# Altium PCB L298N.PcbDoc
Units mm, origin at the board's own origin, x right, y up, seen from the top; angles counter-clockwise.
Board outline 50.1 x 43.1 mm, 2 copper layers (Top Layer, Bottom Layer); 20 components, 15 nets, 63 pads, 2 vias.
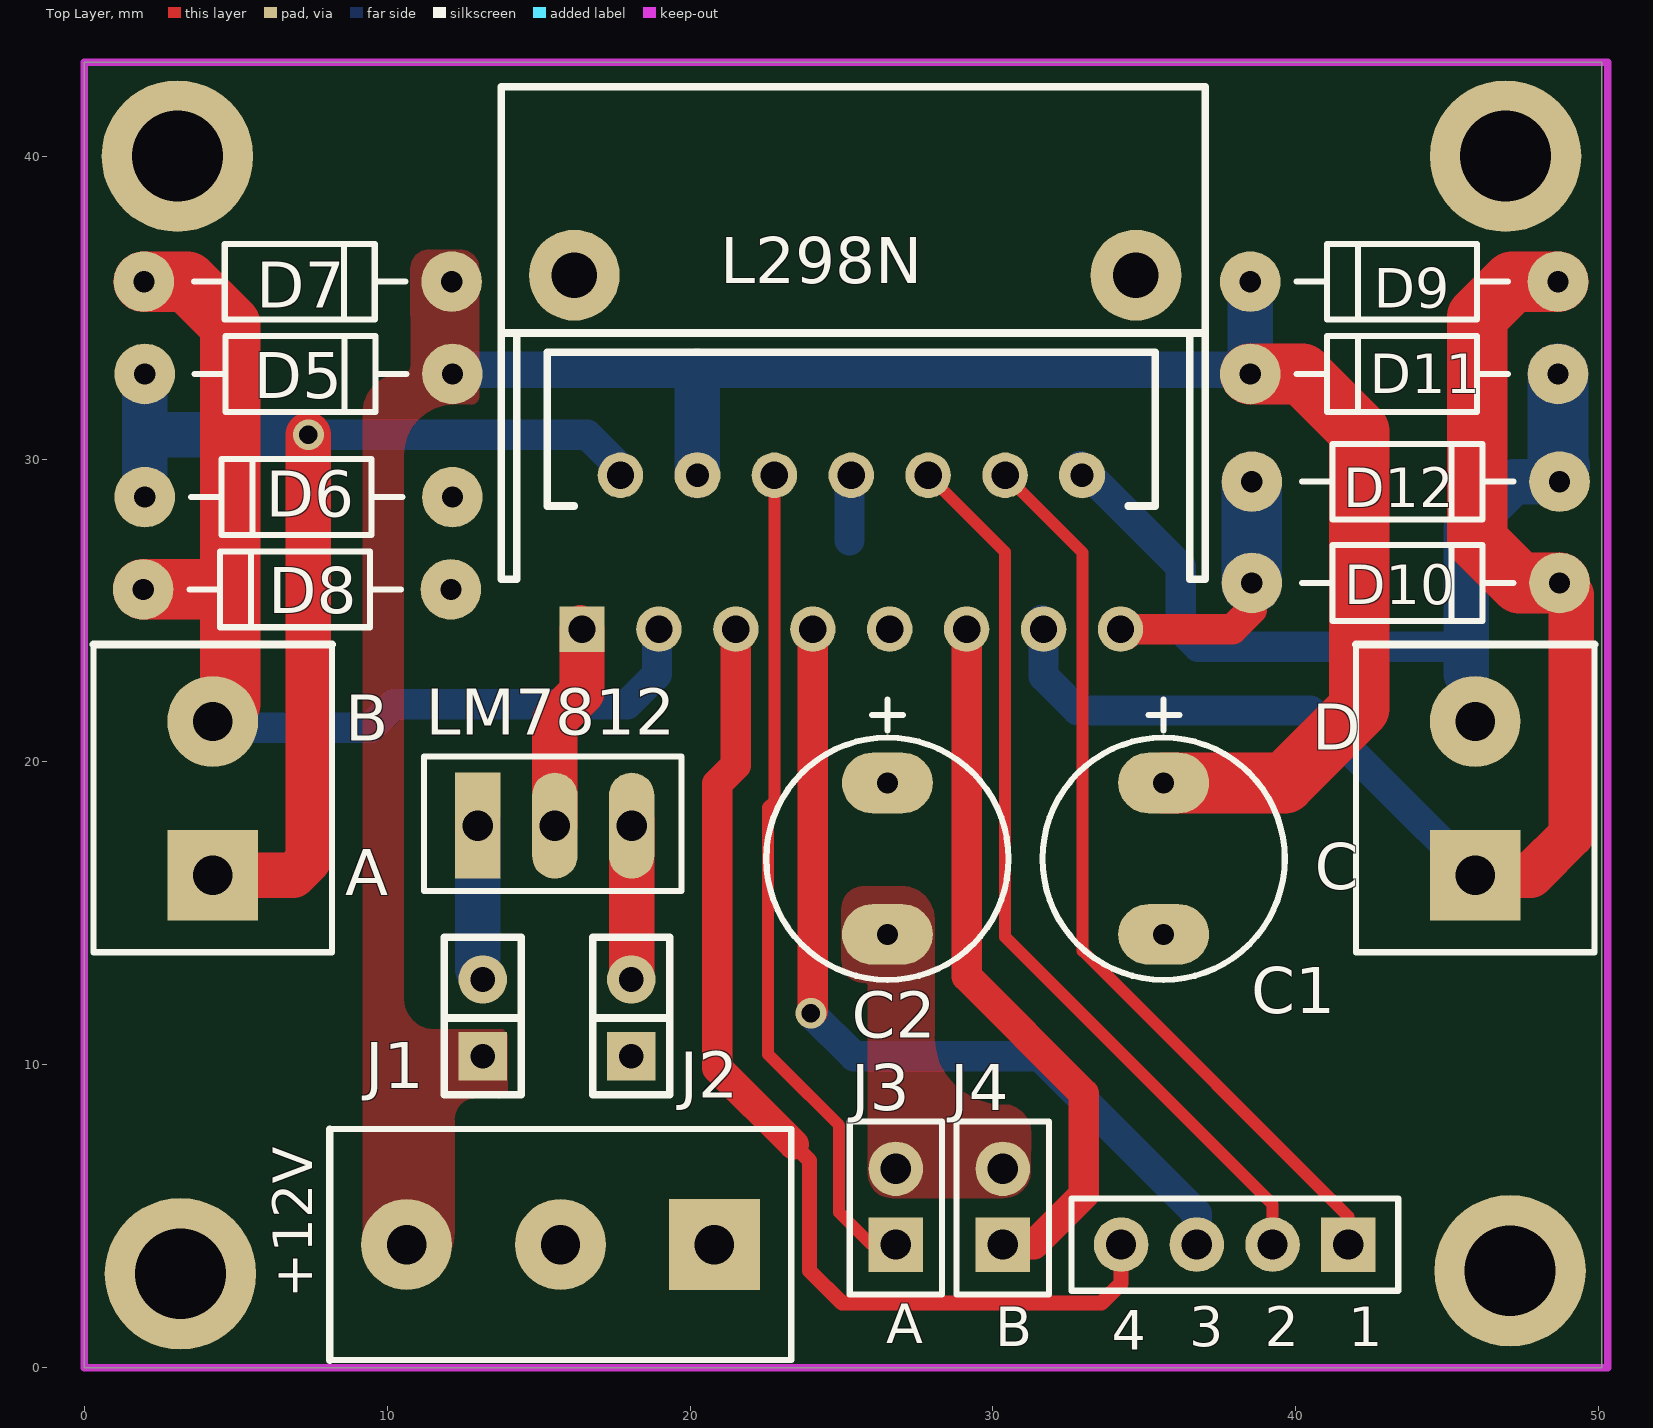
[diagram p0: Top Layer view]
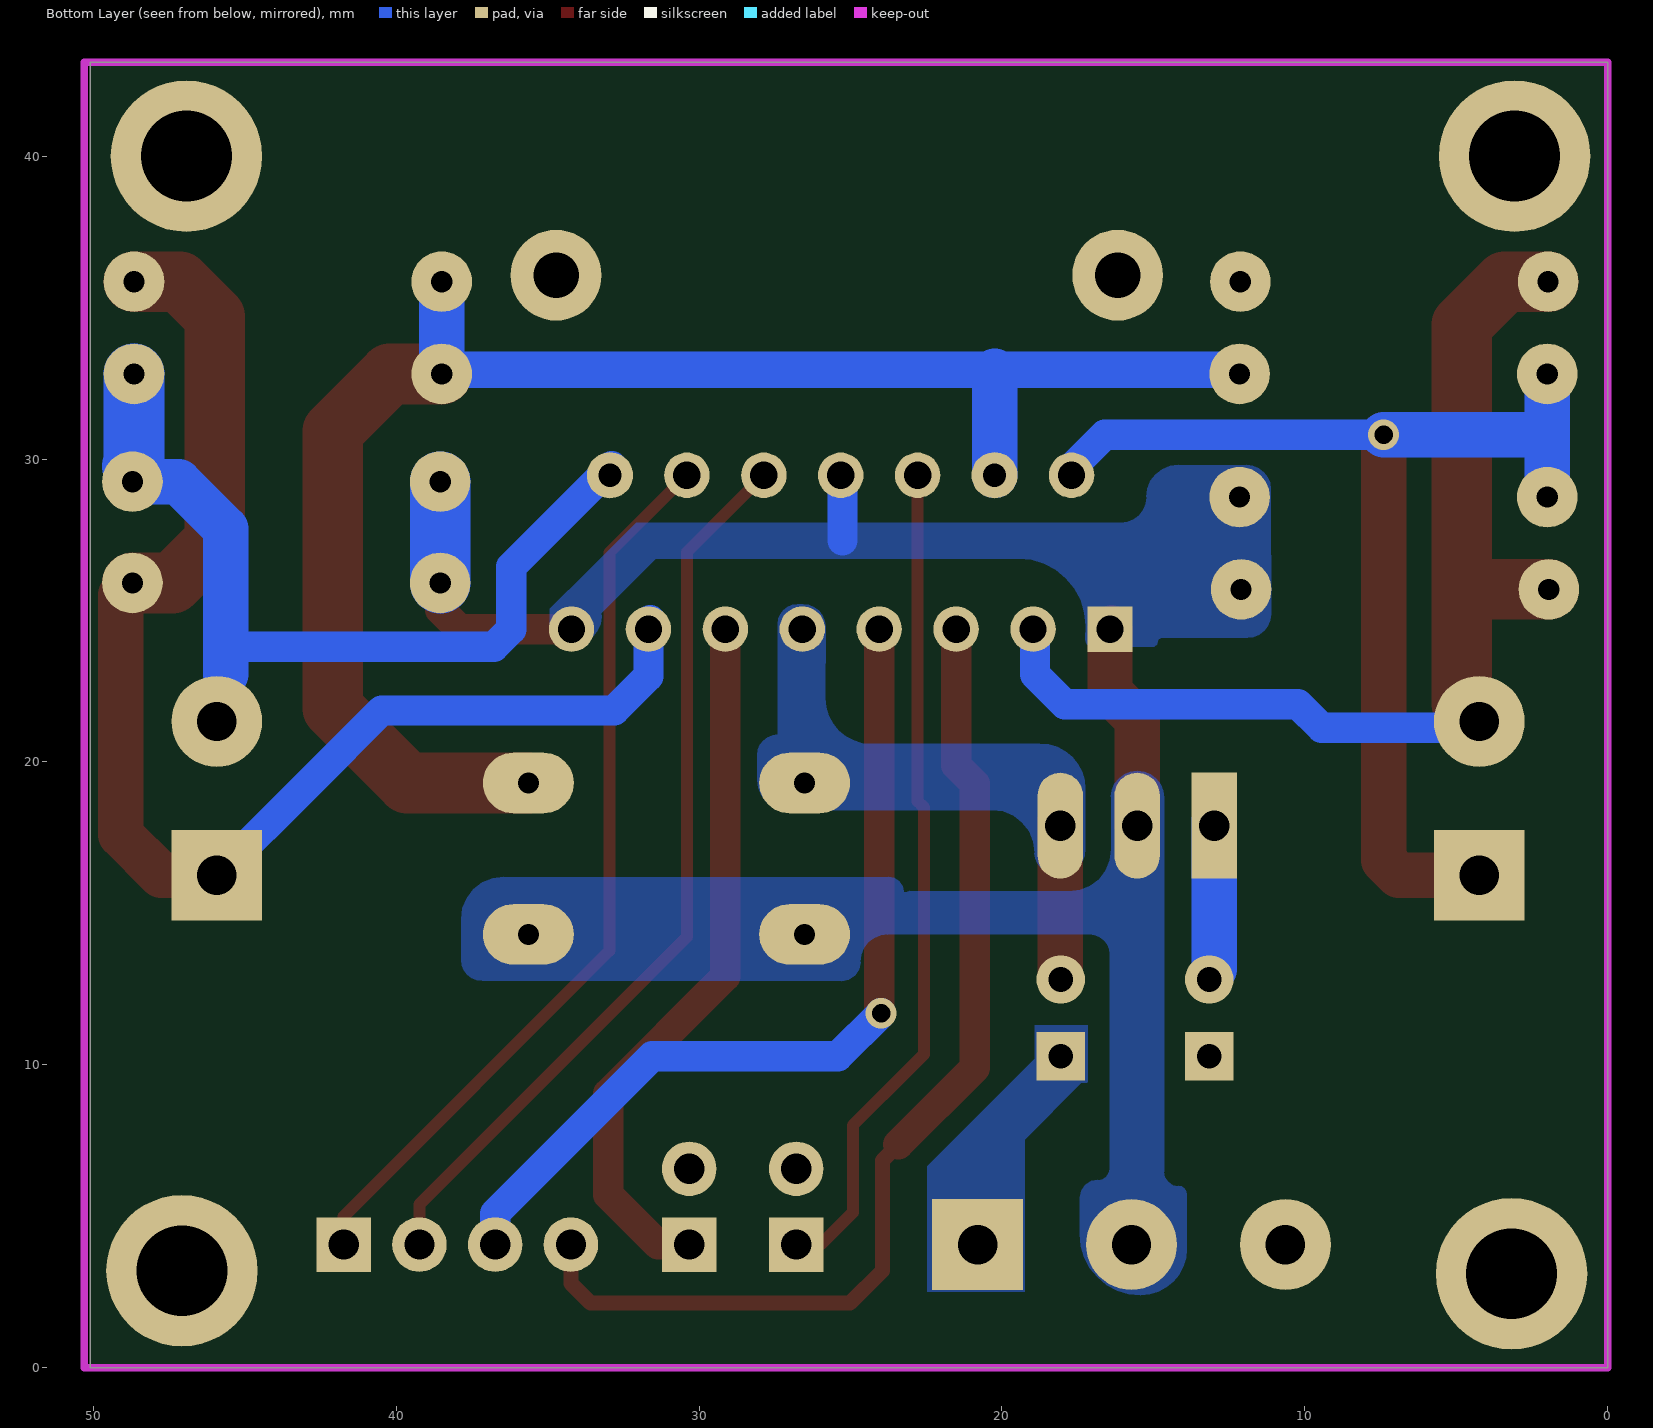
[diagram p1: Bottom Layer view, seen from below]

## Layer stack, top to bottom
Top Layer: signal copper 0.0356
Dielectric: dielectric 0.32, FR-4, Dk 4.8
Bottom Layer: signal copper 0.0356

## Board outline
0,0 50.1,0 50.1,43.1 0,43.1 0,0

## Design rules (kind name [scope] priority, off if disabled: settings)
Clearance [All] p1: gap=0.3
FabricationTestPointUsage TestPointUsage [All] p1: valid=0 allowmultiple=FALSE
FabricationTestpoint Testpoint [All] p1: side=3 testpointundercomponent=TRUE minsize=1.016 maxsize=2.54 preferedsize=1.524 minholesize=0 maxholesize=1.016 preferedholesize=0.813 testpointgrid=0.025 allowsidetop=TRUE allowsidebottom=TRUE usegrid=TRUE gridtolerance=0
PlaneClearance [All] p1: clearance=0.8
PlaneConnect [All] p1: planeconnectstyle=Direct reliefexpansion=0.508 reliefentries=4 reliefconductorwidth=0.254 reliefairgap=0.254
PolygonConnect [All] p1: connectstyle=Direct reliefconductorwidth=0.254 reliefentries=2 polygonreliefangle="90 Angle"
RoutingVias [All] p1: holewidth=0.711 width=1.27 viastyle="Through Hole" minholewidth=0.711 minwidth=1.27 maxholewidth=0.711 maxwidth=1.27
SilkscreenOverComponentPads [All] p1: minsilkscreentomaskgap=0.254
SolderMaskExpansion [All] p1: expansion=0.102
Width [All] p1: maxlimit=3 minlimit=0.254 preferedwidth=2 minimp=50.000000 maximp=50.000000 favimp=50.000000
23 further rules are at their usual default settings.

## Classes and differential pairs
component class L298N: C1 C2 D5 D6 D7 D8 D9 D10 D11 D12 J1 J2

## Components (designator, comment, footprint, x,y, rotation, side; value= is the part's Value field where it differs from the comment)
C1 "16V/220uf" RB5/8 35.636,19.304 r270 top
C2 "16V/220uf" RB5/8 26.518,19.304 r270 top
D5 "1N4007" Diode0.3 1.997,32.808 r0 top
D6 "1N4007" Diode0.3 12.157,28.744 r180 top
D7 "1N4007" Diode0.3 1.972,35.856 r0 top
D8 "1N4007" Diode0.3 12.106,25.696 r180 top
D9 "1N4007" Diode0.3 48.657,35.856 r180 top
D10 "1N4007" Diode0.3 38.548,25.908 r0 top
D11 "1N4007" Diode0.3 48.657,32.808 r180 top
D12 "1N4007" Diode0.3 38.548,29.252 r0 top
J1 "" SIP2 13.157,10.276 r90 top
J2 "CN2" SIP2 18.059,10.276 r90 top
J3 "" XH2.54-2P 26.797,4.064 r180 top
J4 "" XH2.54-2P 30.328,4.064 r180 top
P1 "Header 3" XH5.08-3P 20.803,4.064 r270 top
P2 "Header 4" XH2.54-4P 41.732,4.064 r270 top
P3 "COM2" XH5.08-2P 45.923,16.256 r180 top
P4 "COM2" XH5.08-2P 4.242,16.256 r180 top
U1 "L298N" L298N散热片 34.976,36.068 r270 top
U2 "LM7812" TO-220 12.995,17.896 r0 top

## Footprints (in the part's own frame and the unit in brackets; to place one, negate y for a bottom-side part, rotate by r counter-clockwise, add the part's x,y. Pads: shape width x height; smd on the part's side, far side on the other; paste and mask are expansions set on the pad)
Diode0.3 [mm]
  round 2 hole 0.7: 1(0,0) 2(10.16,0)
  silkscreen extent 1.65,-1.25 8.64,1.25
L298N散热片 [mm]
  round 3 hole 1.5: 0(0,-0.254) 0(0,-18.796)
  rect 1.5x1.5 hole 0.9: 1(11.684,-18.542)
  round 1.5 hole 0.9: 2(6.604,-17.272) 3(11.684,-16.002) 5(11.684,-13.462) 6(6.604,-12.192) 7(11.684,-10.922) 8(6.604,-9.652) 9(11.684,-8.382) 10(6.604,-7.112) 11(11.684,-5.842) 12(6.604,-4.572) 13(11.684,-3.302) 15(11.684,-0.762)
  round 1.524 hole 0.762: 4(6.604,-14.732) 14(6.604,-2.032)
  silkscreen extent -6.22,-21.21 10.03,2.03
RB5/8 [mm]
  oval 2x3 hole 0.7: 1(0,0) 2(5,0)
  silkscreen extent -2.75,-4 6.5,4
SIP2 [mm]
  rect 1.6x1.6 hole 0.813: 1(0,0)
  round 1.6 hole 0.813: 2(2.54,0)
  silkscreen extent -1.27,-1.27 3.94,1.27
TO-220 [mm]
  rect 1.5x3.5 hole 1: 1(0,0)
  oval 1.5x3.5 hole 1: 2(2.54,0) 3(5.08,0)
  silkscreen extent -1.78,-2.16 6.73,2.29
XH2.54-2P [mm]
  rect 1.8x1.8 hole 1: 1(0,0)
  round 1.8 hole 1: 2(0,-2.5)
  silkscreen extent -1.52,-4.06 1.52,1.65
XH2.54-4P [mm]
  rect 1.8x1.8 hole 1: 1(0,0)
  round 1.8 hole 1: 2(0,-2.5) 3(0,-5) 4(0,-7.5)
  silkscreen extent -1.52,-9.14 1.52,1.65
XH5.08-2P [mm]
  rect 3x3 hole 1.3: 1(0,0)
  round 3 hole 1.3: 2(0,-5.08)
  silkscreen extent -3.94,-7.62 3.94,2.54
XH5.08-3P [mm]
  rect 3x3 hole 1.3: 1(0,0)
  round 3 hole 1.3: 2(0,-5.08) 3(0,-10.16)
  silkscreen extent -3.81,-12.7 3.81,2.54

## Part data
C1 C2: library part RB, "Polarized Capacitor (Radial)"
D5 D6 D7 D8 D9 D10 D11 D12: library part "Diode 1N4007", "1 Amp General Purpose Rectifier"
J1 J3 J4: library part CN2
P1: "Header, 3-Pin"
P2: "Header, 4-Pin"
P3 P4: library part "Header 2", "Header, 2-Pin"
U2: library part "Voltage regulator", "Voltage Regulator"

## Free pads (board coordinates)
  round 5 hole 3: 0(3.075,40) 0(3.175,3.1) 0(46.925,40) 0(47.075,3.2)

## Via types
v1: diameter 1.016, hole 0.61, Top Layer to Bottom Layer, 2 vias

## Nets (pads, with @x,y where several pads share a name; then routed paths per layer and width w, separated by ;. In a path a pad name is that pad's centre, name@x,y a point inside that pad or via, vN(x,y) a via of type N, cw(c..) or ccw(c..) an arc to the next point about the centre after c; other vN are vias at no path point)
+5V: C2.1 J2.2 U1.9 U2.3 | length 5.2
  Top Layer w0.381: J2.2@18.024,12.996 J2.2@18.024,13.047
  Top Layer w1.5: J2.2@18.075,13.047 U2.3@18.075,18.076
  Bottom Layer w0.381: U2.3@18.075,18.076 18.075,18.198 U2.3@18.082,18.198
+12V: C1.1 D5.2 D7.2 D9.2 D11.2 J1.1 P1.3 U1.4 | length 54
  Top Layer w2: C1.1 39.629,19.304 42.1,21.775 42.1,30.916 40.208,32.808 D11.2
  Bottom Layer w1.2: D5.2@12.299,32.95 D11.2@38.355,32.95
  Bottom Layer w1.5: D5.2 D5.2@12.299,32.95 ; U1.4 20.244,32.906 ; D11.2@38.355,32.95 D11.2 38.497,33.902 D9.2
GND: C1.2 C2.2 D6.1 D8.1 D10.1 D12.1 J3.2 J4.2 P1.2 U1.1 U1.8 U1.15 U2.2 | length 18.6
  Top Layer w1: U1.1@16.256,24.562 U1.1@16.373,24.68 ; U1.15@34.398,24.2 U1.15 37.909,24.384 38.548,25.023 D10.1 ; D10.1@38.294,25.95 D10.1@38.548,26.204
  Top Layer w1.5: U2.2 15.535,21.4 16.434,22.299 U1.1
  Bottom Layer w1: 25.263,27.313 U1.8@25.263,29.464
  Bottom Layer w2: D10.1@38.548,25.896 D12.1
L298N_A: D5.1 D6.2 P4.1 U1.2 | length 37.5
  Top Layer w1.5: P4.1 6.906,16.256 7.4,16.75 v1(7.4,30.8)
  Bottom Layer w1: v1(7.4,30.8) 16.603,30.8 U1.2@17.643,29.76
  Bottom Layer w1.5: D6.2 D5.1 ; 2.097,30.8 v1(7.4,30.8)
L298N_B: D7.1 D8.2 P4.2 U1.3 | length 37.4
  Top Layer w1: P4.2@4.318,20.944 4.318,21.412 4.318,21.597 4.41,21.505 P4.2@4.791,21.124
  Top Layer w2: D8.2 4.721,25.696 ; D7.1 3.4,35.856 4.825,34.431 4.825,21.919 4.41,21.505 4.318,21.412 P4.2
  Bottom Layer w1: P4.2@4.791,21.124 9.45,21.124 10.226,21.9 17.925,21.9 18.913,22.888 U1.3@18.913,24.6
L298N_C: D9.1 D10.2 P3.1 U1.13 | length 45.9
  Top Layer w1: P3.1@45.634,16.044 P3.1@45.885,16.295 ; D10.2 D10.2@48.708,26.204
  Top Layer w1.5: P3.1 47.756,16.256 49.1,17.6 49.1,25.516 D10.2
  Top Layer w2: D9.1 47.15,35.856 45.99,34.696 45.99,27.31 47.392,25.908 D10.2
  Bottom Layer w1: U1.13@31.613,24.68 31.613,24.337 U1.13@31.62,24.33 ; U1.13 31.674,22.826 32.8,21.7 35.5,21.7 40.479,21.7 42.879,19.3 P3.1 ; P3.1@45.74,16.073 P3.1@45.949,15.864
L298N_D: D11.1 D12.2 P3.2 U1.14 | length 28.5
  Bottom Layer w1: U1.14@32.883,29.76 36.2,26.443 36.2,24.375 36.774,23.801 45.634,23.801
  Bottom Layer w1.5: 45.634,22.9 45.634,23.801 45.634,27.7 47.186,29.252 D12.2 ; D12.2@48.657,29.303 D12.2@48.657,29.76
  Bottom Layer w2: D11.1 48.657,29.811 D12.2@48.708,29.76
NetJ1_2: J1.2 U2.1 | length 5.1
  Top Layer w0.254: J1.2@13.148,12.996 J1.2@13.148,13.148
  Bottom Layer w1.5: J1.2@12.995,13.148 U2.1@12.995,18.076
NetJ2_1: J2.1 P1.1
NetJ3_1: J3.1 U1.6 | length 27.7
  Top Layer w0.4: U1.6 22.784,18.701 22.575,18.492 22.575,10.35 22.784,10.141 22.988,9.938 24.925,8 24.925,5.125 25.986,4.064 J3.1
NetJ4_1: J4.1 U1.11 | length 23.6
  Top Layer w1: U1.11 29.134,12.916 33,9.05 33,5.712 31.352,4.064 J4.1
NetP2_1: P2.1 U1.12 | length 30.3
  Top Layer w0.4: U1.12 32.964,26.904 32.964,20.561 32.964,13.761 41.732,4.993 P2.1
  Top Layer w0.5: U1.12@30.343,29.76 U1.12@30.522,29.582
NetP2_2: P2.2 U1.10 | length 30.4
  Top Layer w0.254: U1.10@27.803,29.76 U1.10@27.982,29.582
  Top Layer w0.4: U1.10 30.404,26.924 30.404,14.221 39.232,5.393 P2.2
NetP2_3: P2.3 U1.7 | length 29.7
  Top Layer w0.5: v1@23.993,11.457 v1(23.993,11.7) v1@23.993,11.76 ; U1.7@23.993,24.384 U1.7@23.993,24.68
  Top Layer w1: v1@24.054,11.76 U1.7
  Bottom Layer w1: v1(23.993,11.7) 25.416,10.278 31.547,10.278 36.732,5.093 P2.3
NetP2_4: P2.4 U1.5 | length 35.3
  Top Layer w0.5: U1.5@21.453,24.384 U1.5@21.453,24.68 ; 23.422,7.372 23.95,6.843 23.95,3.2 25.015,2.135 33.585,2.135 34.232,2.782 P2.4
  Top Layer w1: U1.5 21.514,19.889 20.9,19.275 20.9,9.893 23.422,7.372
pads on no net: U1.0

## Polygon pours and split planes (outlines as drawn)
NetJ2_1 on Bottom Layer "Top Overlay-No Net" (solid, pour order 1001): 18.175,11.3 18.925,11.3 18.925,10.2 22.475,6.65 22.475,2.5 19.25,2.5 19.25,7.525 17.375,9.4 17.275,9.4 17.2,9.4 17.175,9.425 17.175,11.3 18.175,11.3
GND on Bottom Layer "Top Overlay-No Net" (solid, pour order 1002): 11.125,28.8 11.125,24.875 ccw(c11.9,24.875) 11.9,24.1 14.675,24.1 cw(c14.675,23.9) 14.875,23.9 ccw(c14.975,23.9) 14.975,23.8 17,23.8 ccw(c17,24.05) 17.25,24.05 17.25,24.5 cw(c19.45,24.5) 19.45,26.7 28.15,26.7 31.425,26.7 33.225,24.9 33.225,24.8 ccw(c34.125,24.8) 34.125,23.9 34.425,23.9 ccw(c34.425,24.4) 34.925,24.4 34.925,25.05 33.675,26.3 32.075,27.9 26.125,27.9 16.074,27.9 cw(c16.074,28.744) 15.23,28.744 ccw(c14.174,28.744) 14.174,29.8 11.925,29.8 ccw(c11.925,29) 11.125,29 11.125,28.8
GND on Bottom Layer "Top Overlay-No Net" (solid, pour order 1000): 15.425,2.4 cw(c15.425,3.925) 13.9,3.925 13.9,4.3 13.9,5.725 cw(c14.175,5.725) 14.175,6 ccw(c14.175,6.475) 14.65,6.475 14.65,18.6 14.65,18.815 cw(c15.535,18.815) 15.535,19.7 cw(c15.535,18.835) 16.4,18.835 16.4,18.6 16.4,17.112 ccw(c17.775,17.112) 17.775,15.737 23.213,15.737 cw(c23.213,15.7) 23.25,15.7 cw(c23.75,15.7) 23.75,16.2 26.6,16.2 36.45,16.2 cw(c36.45,14.8) 37.85,14.8 37.85,13.467 cw(c37.16,13.467) 37.16,12.778 25.297,12.778 cw(c25.297,13.4) 24.675,13.4 ccw(c23.775,13.4) 23.775,14.3 17.1,14.3 ccw(c17.1,13.65) 16.45,13.65 16.45,7 16.45,6.575 ccw(c16.825,6.575) 16.825,6.2 cw(c16.825,5.6) 17.425,5.6 17.425,4.5 17.425,4.4 cw(c15.425,4.4) 15.425,2.4
+5V on Bottom Layer "Top Overlay-No Net" (solid, pour order 1001): 26.575,25.2 ccw(c26.575,24.45) 25.825,24.45 25.825,24.4 25.825,22.1 cw(c24.325,22.1) 24.325,20.6 18.75,20.6 ccw(c18.75,19.1) 17.25,19.1 17.25,17.125 ccw(c18.075,17.125) 18.075,16.3 18.225,16.3 ccw(c18.225,17) 18.925,17 cw(c20.325,17) 20.325,18.4 25.6,18.4 27.075,18.4 ccw(c27.075,19.4) 28.075,19.4 28.075,20.225 ccw(c27.4,20.225) 27.4,20.9 27.4,24 27.4,24.55 ccw(c26.75,24.55) 26.75,25.2 26.575,25.2
GND on Top Layer "Top Overlay-No Net" (solid, pour order 1003): 25.875,6.6 25.875,6.4 ccw(c26.675,6.4) 26.675,5.6 30.35,5.6 ccw(c30.35,6.5) 31.25,6.5 31.25,7.775 ccw(c30.325,7.775) 30.325,8.7 cw(c30.325,10.95) 28.075,10.95 28.075,14.8 ccw(c26.975,14.8) 26.975,15.9 25.75,15.9 ccw(c25.75,15.15) 25,15.15 25,14.9 25,13.45 ccw(c25.75,13.45) 25.75,12.7 cw(c25.75,12.575) 25.875,12.575 25.875,6.6
+12V on Top Layer "Top Overlay-No Net" (solid, pour order 1003): 10.44,2.7 cw(c10.44,3.94) 9.2,3.94 9.2,16.3 9.2,31.533 cw(c10.475,31.533) 10.475,32.808 ccw(c10.475,33.108) 10.775,33.108 10.775,36.3 cw(c11.384,36.3) 11.384,36.909 12.087,36.909 12.42,36.909 cw(c12.42,36.293) 13.036,36.293 13.036,32.061 cw(c12.775,32.061) 12.775,31.8 12.25,31.8 ccw(c12.25,30.1) 10.55,30.1 10.55,12.188 ccw(c11.56,12.188) 11.56,11.178 13.797,11.178 cw(c13.797,11.1) 13.875,11.1 cw(c13.875,11) 13.975,11 13.975,9.186 cw(c13.689,9.186) 13.689,8.9 12.95,8.9 ccw(c12.95,8.175) 12.225,8.175 12.225,4.5 12.225,4.485 cw(c10.44,4.485) 10.44,2.7

## Keep-outs
Keep-Out Layer:
  lines w0.254: 0,0 50.3,0 50.3,43.1 0,43.1 0,0

## Silkscreen, mask and mechanical layers (free items; w line width, h text height)
Top Overlay:
  text "B" at 8.625,20.7 h1.52
  text "D" at 40.55,20.4 h1.52
  text "C" at 40.625,15.8 h1.52
  text "A" at 8.625,15.6 h1.52
  text "+12V" at 7.525,2.3 h1.3 r90
  text "A" at 26.475,0.8 h1.3
  text "B" at 30.075,0.7 h1.3
  text "3" at 36.475,0.7 h1.3
  text "2" at 38.975,0.7 h1.3
  text "1" at 41.725,0.7 h1.3
  text "4" at 33.925,0.6 h1.3